# Altium PCB S6_Relay_block.PcbDoc
Units mm, origin at the board's own origin, x right, y up, seen from the top; angles counter-clockwise.
Board outline 61 x 55.6 mm, 2 copper layers (Top Layer, Bottom Layer); 95 components, 58 nets, 276 pads, 122 vias.
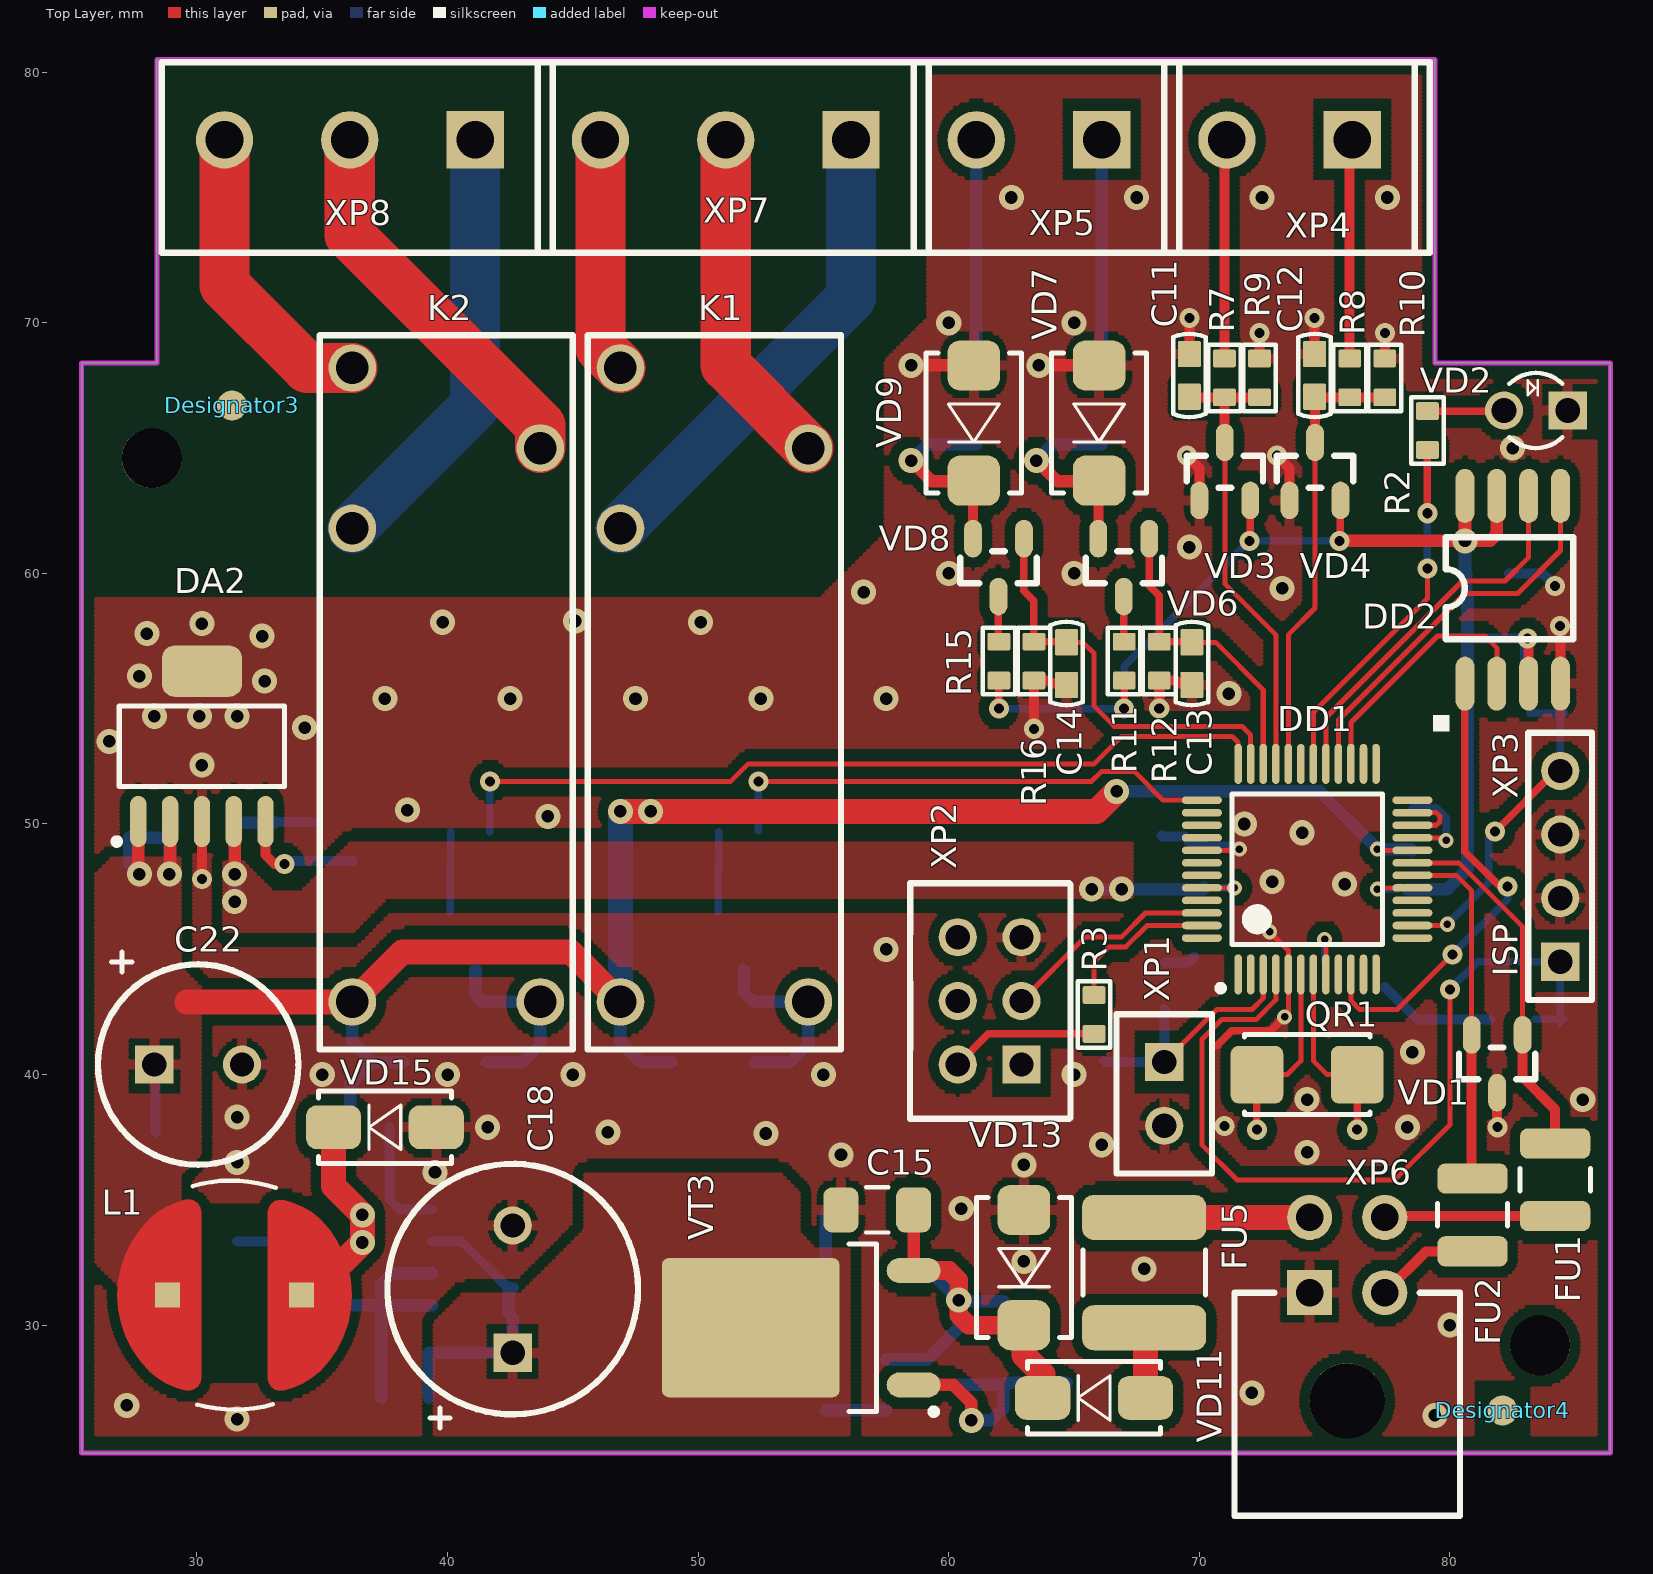
[diagram p0: Top Layer view]
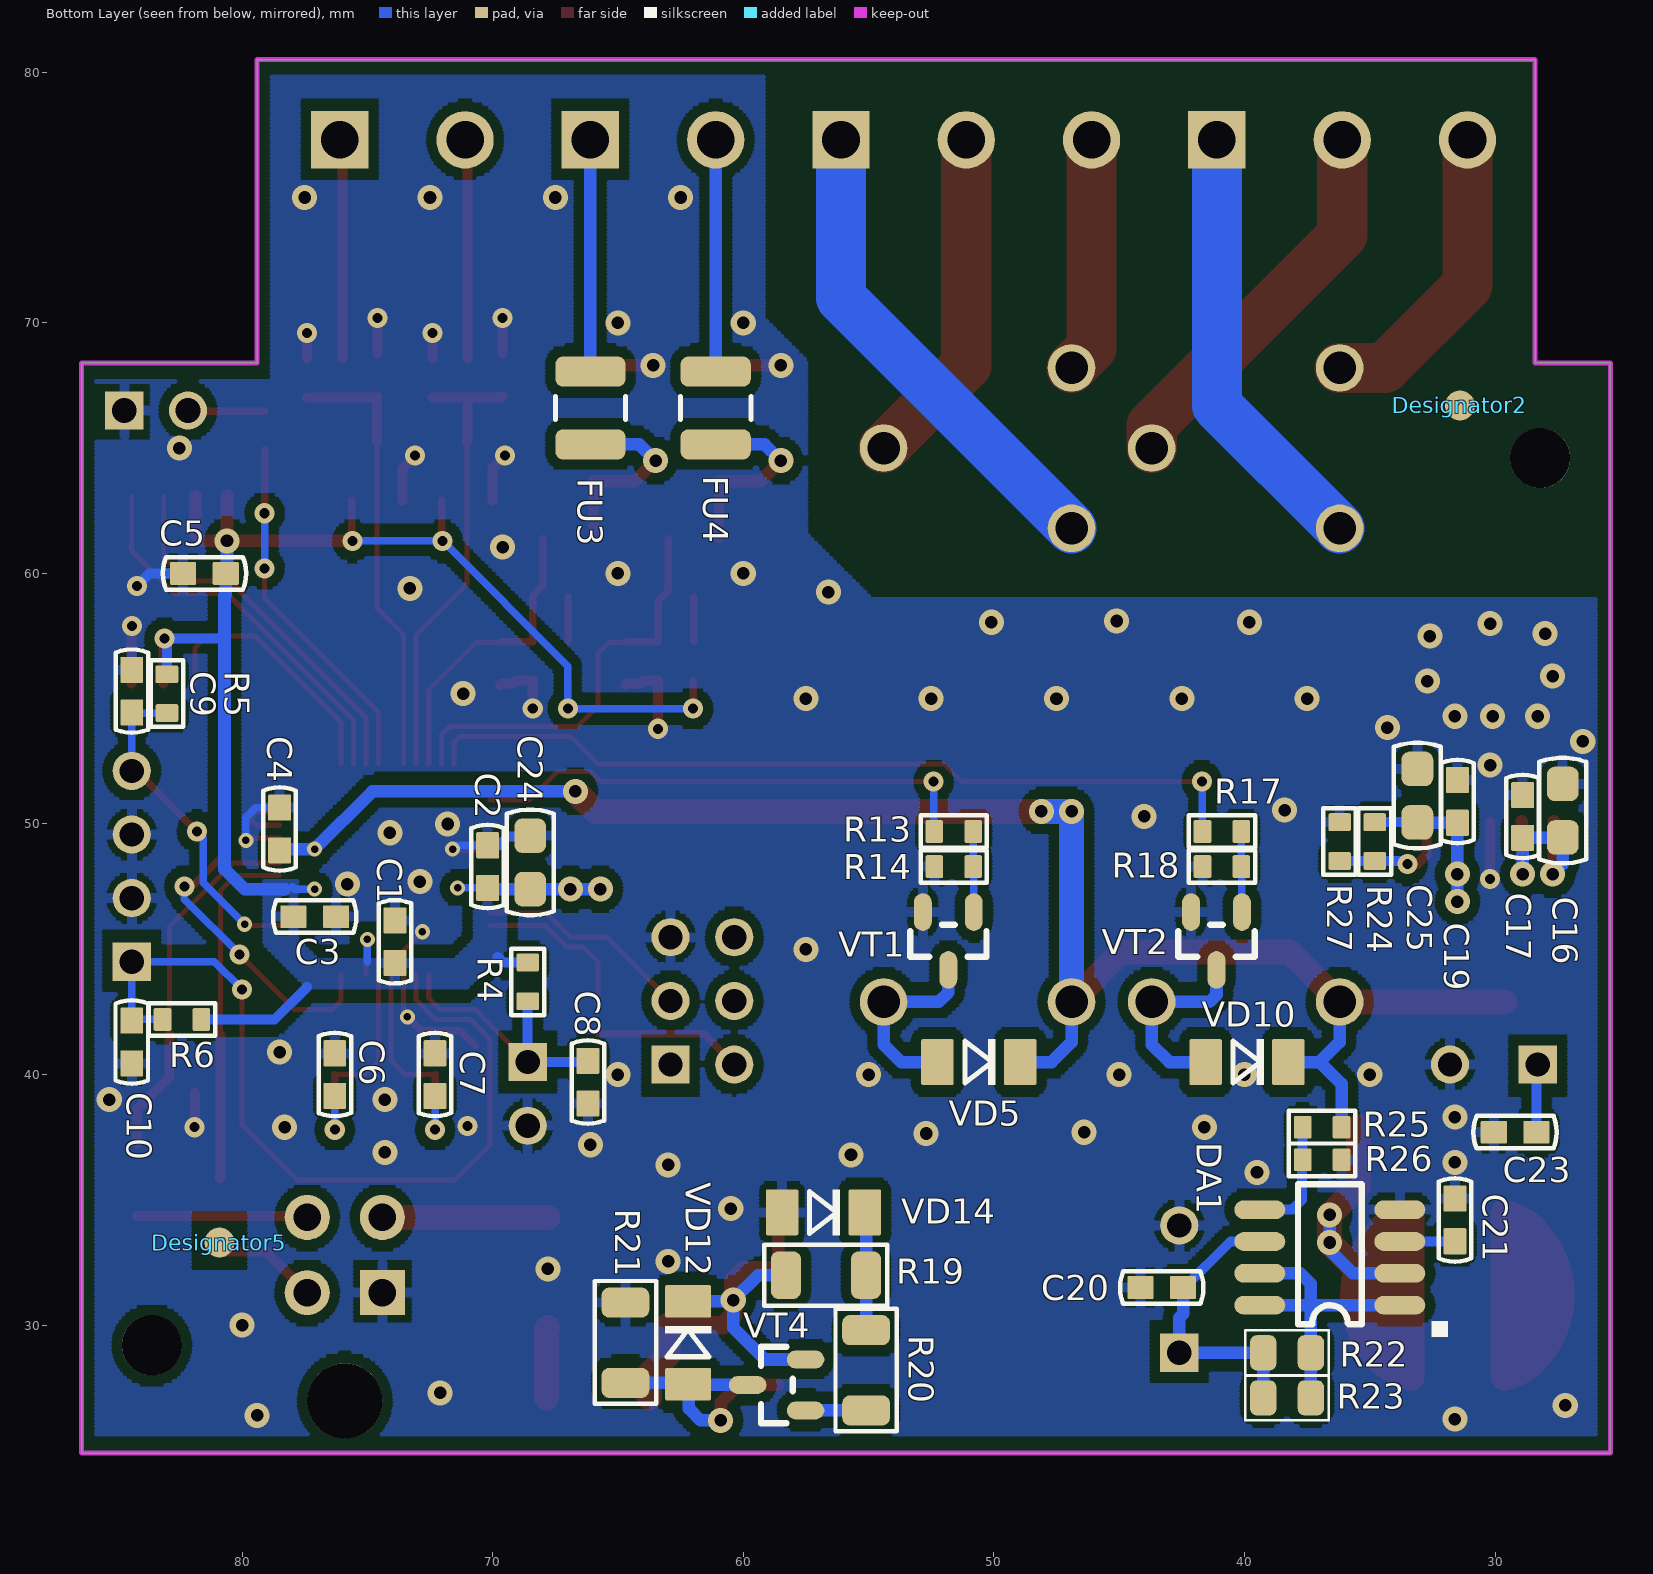
[diagram p1: Bottom Layer view, seen from below]

## Layer stack, top to bottom
Top Solder: solder mask 0.0102, Solder Resist, Dk 3.5
Top Layer: signal copper 0.0356
Dielectric 1: dielectric 0.32, FR-4, Dk 4.8
Bottom Layer: signal copper 0.0356
Bottom Solder: solder mask 0.0102, Solder Resist, Dk 3.5

## Board outline
25.4,24.9 25.4,68.4 28.4,68.4 28.4,80.5 79.4,80.5 79.4,68.4 86.4,68.4 86.4,24.9

## Design rules (kind name [scope] priority, off if disabled: settings)
Clearance Clearance_keepout [IsKeepOut] p1: gap=0.4
Clearance Clearance_Poly [All vs InPoly] p2: gap=0.4
Clearance [All] p3: gap=0.2
ComponentClearance [All] p1: gap=0 collisioncheckmode=3 verticalgap=0 showdistances=FALSE
HoleSize [All] p1: absolutevalues=TRUE maxlimit=8 minlimit=0.025 maxpercent=80.000 minpercent=20.000
MinimumSolderMaskSliver [All] p1: minsoldermaskwidth=0.076
MinimumSolderMaskSliver SilkscreenOverComponentPads [All] p2: minsoldermaskwidth=0.254
PlaneConnect [All] p1: planeconnectstyle=Relief reliefexpansion=0.2 reliefentries=4 reliefconductorwidth=0.254 reliefairgap=0.2
PolygonConnect PolygonConnect_Thermal [IsPad And (PadXSize_TopLayer > 3)] p1: connectstyle=Direct reliefconductorwidth=0.254 reliefentries=4 polygonreliefangle="90 Angle" airgapwidth=0.254
PolygonConnect PolygonConnect_VIA [IsVia] p2: connectstyle=Direct reliefconductorwidth=0.254 reliefentries=4 polygonreliefangle="90 Angle" airgapwidth=0.254
PolygonConnect [All] p3: connectstyle=Relief reliefconductorwidth=0.4 reliefentries=4 polygonreliefangle="90 Angle" airgapwidth=0.254
RoutingVias [All] p1: holewidth=0.3 width=0.6 viastyle="Through Hole" minholewidth=0.3 minwidth=0.6 maxholewidth=0.5 maxwidth=1
SilkToSilkClearance [All] p1: silktosilkclearance=0
SilkToSolderMaskClearance [IsPad] p1: minsilkscreentomaskgap=0.1 clearancetoexposedcopper=TRUE
SolderMaskExpansion SolderMaskExpansion_DD2 [IsPad And InComponent(DD2)] p1: expansion=0.05
SolderMaskExpansion SolderMaskExpansion_VIA [IsVia] p2: expansion=-25.4
SolderMaskExpansion SolderMaskExpansion_1 [IsPad And PadYSize_TopLayer < 0.4] p3: expansion=0.05
SolderMaskExpansion [All] p4: expansion=0.076
Width [All] p1: maxlimit=2 minlimit=0.2 preferedwidth=0.3
24 further rules are at their usual default settings.

## Classes and differential pairs
component class Power: C15 C16 C17 C18 C19 C20 C21 C22 C23 C25 DA1 DA2 FU5 L1 R19 R20 R21 R22 R23 R24 R25 R26 R27 VD11 VD12 VD13 VD14 VD15 VT3 VT4 XP6
component class Output: C13 C14 FU3 FU4 K1 K2 R11 R12 R13 R14 R15 R16 R17 R18 VD5 VD6 VD7 VD8 VD9 VD10 VT1 VT2 XP4 XP5 XP7 XP8
component class Main: C1 C2 C3 C4 C5 C6 C7 C8 C9 C10 C11 C12 C24 DD1 DD2 FU1 FU2 QR1 R2 R3 R4 R5 R6 R7 R8 R9 R10 VD1 VD2 VD3 VD4 XP1 XP2 XP3

## Components (designator, comment, footprint, x,y, rotation, side; value= is the part's Value field where it differs from the comment)
C1 "0.1uF" CC0603-3M 73.9,45.3 r90 bottom
C2 "0.1uF" CC0603-3M 70.2,48.3 r90 bottom
C3 "0.1uF" CC0603-3M 77.1,46.3 r180 bottom
C4 "0.1uF" CC0603-3M 78.5,49.8 r90 bottom
C5 "0.1uF" CC0603-3M 81.5,60 r180 bottom
C6 "22pF" CC0603-3M 76.3,40 r270 bottom
C7 "22pF" CC0603-3M 72.3,40 r270 bottom
C8 "220pF" CC0603-3M 66.2,39.7 r90 bottom
C9 "220pF" CC0603-3M 84.4,55.3 r270 bottom
C10 "220pF" CC0603-3M 84.4,41.3 r90 bottom
C11 "0.1uF" CC0603-3M 69.6,67.9 r270 top
C12 "0.1uF" CC0603-3M 74.6,67.9 r270 top
C13 "0.1uF" CC0603-3M 69.7,56.4 r90 top
C14 "0.1uF" CC0603-3M 64.7,56.4 r90 top
C15 "0.1uFx250V" CC1206-MIDI 55.7,34.6 r0 top
C16 "4.7uFx10V" CC0805-MIDI-2M1 27.3,51.6 r270 bottom
C17 "0.1uF" CC0603-3M 28.9,50.3 r90 bottom
C18 "470uF x 35V" CC16X10_CAP0.5(1)(Primary) 42.6,28.9 r90 top
C19 "0.1uF" CC0603-3M 31.5,50.9 r270 bottom
C20 "0.1uF" CC0603-3M 43.3,31.5 r0 bottom
C21 "330pFx50V" CC0603-3M 31.6,34.2 r270 bottom
C22 "1000uF x 6.3V" CC8X3.5 28.3,40.4 r0 top
C23 "1uFx10V" CC0603-3M 29.2,37.7 r180 bottom
C24 "4.7uFx10V" CC0805-MIDI-2M1 68.5,47.4 r90 bottom
C25 "4.7uFx10V" CC0805-MIDI-2M1 33.1,52.2 r270 bottom
DA1 "MC34063" SO-8 33.8,30.8 r90 bottom
DA2 "MCP1824T-ADJE/DC" SOT223-6 30.2,53.1 r90 top
DD1 "LPC11C24FBD48" LQFP-48 74.3,48.2 r90 top
DD2 "M25P40" EIAJ_SO8 80.6,55.6 r90 top
Designator2 "Comment" REPER1.2 31.4,66.7 r90 bottom
Designator3 "Comment" REPER1.2 31.4,66.7 r90 top
Designator4 "Comment" REPER1.2 82.1,26.6 r90 top
Designator5 "Comment" REPER1.2 80.9,33.3 r90 bottom
FU1 "MICROSMD010F" RC1210 84.2,35.8 r270 top
FU2 "MICROSMD010F" RC1210 80.9,34.4 r270 top
FU3 "MICROSMD010F" RC1210 66.1,66.6 r270 bottom
FU4 "MICROSMD010F" RC1210 61.1,66.6 r270 bottom
FU5 "MF-SMDF050" MF-SMDF 67.8,32.1 r270 top
K1 "RY21" RY21_RY21(Primary) 46.9,42.9 r90 top
K2 "RY21" RY21_RY21(Primary) 36.2,42.9 r90 top
L1 "220uH" SDR0805 31.5,31.2 r0 top
QR1 "NX5032GA-12.000MHz LN-CD-1" AC5032_2 74.3,40 r0 top
R2 "330" RC0603-3M 79.1,65.7 r90 top
R3 "100E" RC0603-3M 65.8,42.4 r270 top
R4 "10k" RC0603-3M 68.6,43.7 r270 bottom
R5 "10k" RC0603-3M 83,55.2 r90 bottom
R6 "10k" RC0603-3M 82.4,42.2 r180 bottom
R7 "75k" RC0603-3M 71,67.8 r270 top
R8 "75k" RC0603-3M 76,67.8 r270 top
R9 "10k" RC0603-3M 72.4,67.8 r270 top
R10 "10k" RC0603-3M 77.4,67.8 r270 top
R11 "4k7" RC0603-3M 67,56.5 r270 top
R12 "100k" RC0603-3M 68.4,56.5 r90 top
R13 "4k7" RC0603-3M 51.6,49.7 r180 bottom
R14 "47k" RC0603-3M 51.6,48.3 r180 bottom
R15 "4k7" RC0603-3M 62,56.5 r270 top
R16 "100k" RC0603-3M 63.4,56.5 r90 top
R17 "4k7" RC0603-3M 40.9,49.7 r180 bottom
R18 "47k" RC0603-3M 40.9,48.3 r180 bottom
R19 "220k" RC1206-2M 55.1,32 r0 bottom
R20 "220k" RC1206-2M 55.1,26.6 r90 bottom
R21 "220k" RC1206-2M 64.7,27.7 r90 bottom
R22 "1E" RC0805_IPC_NOM 38.3,28.9 r180 bottom
R23 "1E" RC0805_IPC_NOM 38.3,27.1 r180 bottom
R24 "105k 1%" RC0603-3M 34.8,49.3 r90 bottom
R25 "3k 1%" RC0603-3M 36.9,37.9 r180 bottom
R26 "1k 1%" RC0603-3M 36.9,36.6 r0 bottom
R27 "15k 1%" RC0603-3M 36.2,49.3 r270 bottom
VD1 "PESD2CAN" SOT-23(123) 82.9,41.6 r90 top
VD2 "BL-B45V1F" LED3 84.7,66.5 r180 top
VD3 "BAT54S" SOT-23(GSD) 70,62.9 r0 top
VD4 "BAT54S" SOT-23(GSD) 73.6,62.9 r0 top
VD5 "LL4148" SOD-80 50.6,40.5 r0 bottom
VD6 "BAT54A" SOT-23(123) 68,61.4 r90 top
VD7 "P6SMBJ28A" SMB 66,66 r90 top
VD8 "BAT54A" SOT-23(123) 63,61.4 r90 top
VD9 "P6SMBJ28A" SMB 61,66 r90 top
VD10 "LL4148" SOD-80 39.9,40.5 r0 bottom
VD11 "GS1M" SMA 65.8,27.1 r180 top
VD12 "BZV55C15" SOD-80 62.2,29.3 r270 bottom
VD13 "SMBJ150A" SMB 63,32.3 r90 top
VD14 "BZV55C36" SOD-80 56.8,34.5 r0 bottom
VD15 "SS14" SMA 37.5,37.9 r180 top
VT1 "BC817-40" SOT-23(123) 50.8,46.5 r90 bottom
VT2 "BC817-40" SOT-23(123) 40.1,46.5 r90 bottom
VT3 "IRFR9220" D-PAK(TO-252AA) 54.1,29.9 r180 top
VT4 "BC856B" SOT-23(123) 57.5,26.6 r180 bottom
XP1 "PLS-02" PIN2W 68.6,40.5 r270 top
XP2 "PLD-06" PIN6 62.9,40.4 r90 top
XP3 "PLS04" PIN04S 84.4,44.5 r90 top
XP4 "TC020060" TC020060 76.1,77.3 r180 top
XP5 "TC020060" TC020060 66.1,77.3 r180 top
XP6 "MIF2X02PRP" MIF2X02PRP 74.4,31.3 r270 top (schematic designator XP5)
XP7 "TC030060" TC030060 56.1,77.3 r180 top
XP8 "TC030060" TC030060 41.1,77.3 r180 top

## Footprints (in the part's own frame and the unit in brackets; to place one, negate y for a bottom-side part, rotate by r counter-clockwise, add the part's x,y. Pads: shape width x height; smd on the part's side, far side on the other; paste and mask are expansions set on the pad)
AC5032_2 [mm]
  rrect30% 2.1x2.3 smd: 1(-2,0) 2(2,0)
  silkscreen extent -2.5,-1.6 2.5,1.6
CC8X3.5 [mil]
  rect 60x60 hole 38: 1(0,0)
  round 60 hole 38: 2(137.8,0)
  silkscreen extent -89,-157 226,157
CC16X10_CAP0.5(1)(Primary) [mil]
  round 60 hole 38: 1(200,0)
  rect 60x60 hole 38: 2(0,0)
  silkscreen extent -97,-197 297,197
CC0603-3M [mil]
  rrect10% 40.98x35.98 smd paste-1000: 1(-33.5,0) 2(33.5,0)
  silkscreen extent -65,-26 65,26
CC0805-MIDI-2M1 [mil]
  rrect50% 54x50 smd: 1(0,0) 2(84,0)
  silkscreen extent -41,-37 125,37
CC1206-MIDI [mm]
  rrect50% 1.4x1.8 smd: 1(0,0) 2(2.9,0)
  silkscreen extent 1,-0.9 1.9,0.9
D-PAK(TO-252AA) [mm]
  oval 2.15x1 smd: 1(-4.5,2.28) 2(-4.5,-2.28)
  rrect10% 7.1x5.55 smd: 3(2,0)
  silkscreen extent -5.42,-3.35 -1.92,3.47
EIAJ_SO8 [mil]
  oval 85x29.53 smd: 1(0,0) 2(0,-50) 3(0,-100) 4(0,-150) 5(295,-150) 6(295,-100) 7(295,-50) 8(295,0)
  silkscreen extent -75,-170 230,50
LED3 [mil]
  rect 60x60 hole 39: 1(0,0)
  round 60 hole 39: 2(100,0)
  silkscreen extent 8,-59 92,59
LQFP-48 [mm]
  oval 1.6x0.3 smd: 1(-4.2,2.75) 2(-4.2,2.25) 3(-4.2,1.75) 4(-4.2,1.25) 5(-4.2,0.75) 6(-4.2,0.25) 7(-4.2,-0.25) 8(-4.2,-0.75) 9(-4.2,-1.25) 10(-4.2,-1.75) 11(-4.2,-2.25) 12(-4.2,-2.75) 25(4.2,-2.75) 26(4.2,-2.25) 27(4.2,-1.75) 28(4.2,-1.25) 29(4.2,-0.75) 30(4.2,-0.25) 31(4.2,0.25) 32(4.2,0.75) 33(4.2,1.25) 34(4.2,1.75) 35(4.2,2.25) 36(4.2,2.75)
  oval 0.3x1.6 smd: 13(-2.75,-4.2) 14(-2.25,-4.2) 15(-1.75,-4.2) 16(-1.25,-4.2) 17(-0.75,-4.2) 18(-0.25,-4.2) 19(0.25,-4.2) 20(0.75,-4.2) 21(1.25,-4.2) 22(1.75,-4.2) 23(2.25,-4.2) 24(2.75,-4.2) 37(2.75,4.2) 38(2.25,4.2) 39(1.75,4.2) 40(1.25,4.2) 41(0.75,4.2) 42(0.25,4.2) 43(-0.25,4.2) 44(-0.75,4.2) 45(-1.25,4.2) 46(-1.75,4.2) 47(-2.25,4.2) 48(-2.75,4.2)
  silkscreen extent -4.87,-3 3,3.57
MF-SMDF [mm]
  rrect50% 1.8x4.95 smd: 1(-2.2,0) 2(2.2,0)
  silkscreen extent -0.9,-2.45 0.9,2.45
MIF2X02PRP [mm]
  rect 1.8x1.8 hole 1.1: 1(0,0)
  round 1.8 hole 1.1: 2(0,3) 3(-3,0) 4(-3,3)
  round 3 hole 3 unplated: 5(4.32,1.5)
  silkscreen extent 0,-3 8.9,6
PIN2W [mil]
  rect 60x60 hole 38: 1(0,0)
  round 60 hole 38: 2(100,0)
  silkscreen extent -75,-75 175,75
PIN04S [mil]
  rect 60x60 hole 38: 1(0,0)
  round 60 hole 38: 2(100,0) 3(200,0) 4(300,0)
  silkscreen extent -60,-50 360,50
PIN6 [mil]
  rect 60x60 hole 38: 1(0,0)
  round 60 hole 38: 2(0,100) 3(100,0) 4(100,100) 5(200,0) 6(200,100)
  silkscreen extent -85,-77 285,175
RC0603-3M [mm]
  rrect20% 0.71x0.91 smd paste-25.4: 1(-0.775,0) 2(0.775,0)
  silkscreen extent -1.32,-0.65 1.33,0.65
RC0805_IPC_NOM [mm]
  rrect50% 1.05x1.4 smd: 1(-0.95,0) 2(0.95,0)
  silkscreen extent -1.67,-0.89 1.67,0.89
RC1206-2M [mm]
  rrect50% 1.2x1.9 smd: 1(0,0) 2(3.2,0)
  silkscreen extent -0.84,-1.22 4.06,1.22
RC1210 [mm]
  rrect50% 1.2x2.8 smd: 1(-1.45,0) 2(1.45,0)
  silkscreen extent -0.45,-1.4 0.45,1.4
REPER1.2 [mm]
  round 1.2 smd paste-25.4 mask-25.4: 1(0,0)
  Top Layer pour cut-out: -1.2,-1.2 1.2,-1.2 1.2,1.2 -1.2,1.2
RY21_RY21(Primary) [mm]
  round 1.9 hole 1.3: 1(0,-7.5) 2(0,0) 11(22.1,-7.5) 12(18.9,0) 14(25.3,0)
  silkscreen extent -1.9,-8.8 26.6,1.3
SDR0805 [mm]
  rect 1x1 smd paste-25.4 mask-25.4: 1(-2.667,0) 2(2.667,0)
  Top Layer region: -1.327,3.319 -1.362,3.503 -1.461,3.66 -1.612,3.771 -1.792,3.818 -1.977,3.797 -2.318,3.69 -2.706,3.535 -3.065,3.321 -3.387,3.053 -3.392,3.047 -3.771,2.627 -4.09,2.16 -4.345,1.654 -4.53,1.119 -4.642,0.565 -4.68,0 -4.642,-0.565 -4.53,-1.119 -4.345,-1.654 -4.09,-2.16 -3.771,-2.627 -3.392,-3.047 -3.381,-3.059 -3.063,-3.323 -2.709,-3.534 -2.325,-3.688 -1.996,-3.791 -1.806,-3.813 -1.62,-3.764 -1.465,-3.65 -1.363,-3.488 -1.327,-3.299
  Top Layer region: 1.327,-3.319 1.362,-3.503 1.461,-3.66 1.612,-3.771 1.792,-3.818 1.977,-3.797 2.318,-3.69 2.706,-3.535 3.065,-3.321 3.387,-3.053 3.392,-3.047 3.771,-2.627 4.09,-2.16 4.345,-1.654 4.53,-1.119 4.642,-0.565 4.68,0 4.642,0.565 4.53,1.119 4.345,1.654 4.09,2.16 3.771,2.627 3.392,3.047 3.381,3.059 3.063,3.323 2.709,3.534 2.325,3.688 1.996,3.791 1.806,3.813 1.62,3.764 1.465,3.65 1.363,3.488 1.327,3.299
  silkscreen extent -1.66,-4.57 1.64,4.57
SMA [mm]
  rrect50% 2.2x1.75 smd: 1(-2.05,0) 2(2.05,0)
  silkscreen extent -2.65,-1.45 2.65,1.45
SMB [mm]
  rrect50% 2x2.1 smd: 1(2.3,0) 2(-2.3,0)
  silkscreen extent -2.8,-1.9 2.8,1.9
SO-8 [mil]
  oval 29.53x80 smd: 1(0,0) 2(50,0) 3(100,0) 4(150,0) 5(150,220) 6(100,220) 7(50,220) 8(0,220)
  silkscreen extent -50,-75 190,160
SOD-80 [mm]
  rrect10% 1.3x1.83 smd paste-25.4: 1(1.651,0) 2(-1.651,0)
  silkscreen extent -0.66,-0.91 0.56,0.91
SOT223-6 [mm]
  oval 2.05x0.65 smd: 1(-3,2.54) 2(-3,1.27) 3(-3,0) 4(-3,-1.27) 5(-3,-2.54)
  rrect50% 2.05x3.2 smd: 6(3,0)
  silkscreen extent -3.92,-3.3 1.6,3.52
SOT-23(123) [mil]
  oval 59.06x28.07 smd: 1(-0.5,0) 2(-0.5,80) 3(-91.5,40)
  silkscreen extent -70,-20 -21,100
SOT-23(GSD) [mil]
  oval 28.07x59.06 smd: 1(0,0.5) 2(80,0.5) 3(40,91.5)
  silkscreen extent -20,20 100,70
TC020060 [mil]
  rect 90x90 hole 59: 1(0,0)
  round 90 hole 59: 2(196.85,0)
  silkscreen extent -122,-122 295,177
TC030060 [mil]
  rect 90x90 hole 59: 1(0,0)
  round 90 hole 59: 2(196.85,0) 3(393.7,0)
  silkscreen extent -122,-122 492,177

## Part data
C1 C2 C3 C4 C5 C6 C7 C8 C9 C10 C11 C12 C13 C14 C17 C19 C20 C21 C23: library part CC0603, "CC0603"
C15: library part CC1206, "CC1206"
C16 C24 C25: library part CC0805, "CC0805"
C18: library part CAP0.5(1), "CAP0.5(1)"
C22: library part CAP0.35, "CAP0.35"
DA2: "300 mA, Low Voltage, Low Quiescent Current LDO Regulator, 5-Pin SOT-223, Extended Temperature, Tape and Reel"
DD2: library part S25FL016A0LMFI01, "S25FL016A0LMFI01"
FU1 FU2 FU3 FU4: library part MICROSMD, "MICROSMD"
FU5: library part MF-SMDF, "MF-SMDF"
L1: library part SDR0805, "SDR0805"
QR1: library part AC5032_2, "AC5032/2"
R2 R3 R4 R5 R6 R7 R8 R9 R10 R11 R12 R13 R14 R15 R16 R17 R18 R24 R25 R26 R27: library part RC0603, "RC0603"
R19 R20 R21: library part RC1206, "RC1206"
R22 R23: library part RC0805, "RC0805"
VD1: "TVS for CAN"
VD2: library part LED_3, "LED_3"
VD3 VD4 VD6 VD8: "1.0 Ampere General Purpose Rectifier"
VD7 VD9 VD13: library part SMBJ, "SMBJ"
VD12 VD14: library part BZV55C12, "Zener Voltage Regulator Diode"
VD15: "Schottky Rectifier"
VT1 VT2: library part BC846BLT1, "BC846BLT1"
VT3: "HEXFET Power MOSFET"
XP2: "PLD06"

## Free pads (board coordinates)
  round 2.4 hole 2.4 unplated paste+0 mask+0.102: 0(28.2,64.6)
  round 2.4 hole 2.4 unplated: 0(83.6,29.2)

## Via types
v1: diameter 1, hole 0.5, Top Layer to Bottom Layer, 84 vias
v2: diameter 0.8, hole 0.4, Top Layer to Bottom Layer, 29 vias
v3: diameter 0.6, hole 0.3, Top Layer to Bottom Layer, 9 vias

## Nets (pads, with @x,y where several pads share a name; then routed paths per layer and width w, separated by ;. In a path a pad name is that pad's centre, name@x,y a point inside that pad or via, vN(x,y) a via of type N, cw(c..) or ccw(c..) an arc to the next point about the centre after c; other vN are vias at no path point)
+5V: C4.1 C16.2 C17.1 C22.1 C23.2 DA2.1 DA2.2 DD1.20 K1.2 K2.2 L1.1 R25.2 VD5.2 VD10.2 | length 84.3
  Top Layer w0.2: v3(77.1,49) 77.15,48.95 DD1.20
  Top Layer w0.5: v1@27.6,48.2 27.66,48.26 DA2.1 ; v1@28.9,48.2 28.93,48.23 DA2.2
  Top Layer w1: 29.6,42.9 K2.2 38.2,44.9 44.9,44.9 K1.2 ; v1(46.9,50.5) v1(48.1,50.5) 65.9,50.5 v1(66.7,51.3)
  Bottom Layer w0.4: C22.1 28.349,40.351 C23.2
  Bottom Layer w0.5: v1(27.7,48) 27.3,48.4 C16.2 27.317,49.449 C17.1 v1(28.9,48) ; R25.2 36.125,39.625 37,40.5 ; K2.2 36.2,41.3 37,40.5 ; VD10.2 37,40.5 ; K1.2 46.9,41.3 47.7,40.5 VD5.2 ; v1(66.7,51.3) 74.8,51.3 v3(77.1,49) 78.449,49 C4.1
  Bottom Layer w1: K1.2 v1(46.9,50.5) v1(48.1,50.5)
ANALOG1: R8.1 XP4.1 | length 8.8
  Top Layer w0.4: R8.1 76,77.2 XP4.1
ANALOG1_F: C12.2 DD1.32 R8.2 R10.2 VD4.3 | length 17.9
  Top Layer w0.2: DD1.32 73.55,57.55 74.616,58.616 VD4.3
  Top Layer w0.4: C12.2 C12.2@74.616,67.033 ; VD4.3 C12.2@74.616,67.033 ; R10.2 R8.2 74.624,67.025 C12.2@74.616,67.033
ANALOG2: R7.1 XP4.2 | length 8.8
  Top Layer w0.4: R7.1 71,77.2 XP4.2
ANALOG2_F: C11.2 DD1.33 R7.2 R9.2 VD3.3 | length 18.3
  Top Layer w0.2: VD3.3 71.016,59.584 73.05,57.55 DD1.33
  Top Layer w0.4: C11.2 69.624,67.025 R7.2 ; VD3.3 71,65.24 R7.2 ; R9.2 R7.2
CANH: DD1.19 FU1.1 VD1.1 | length 14.6
  Top Layer w0.2: DD1.19 80.35,48.45 82.9,45.9 VD1.1
  Top Layer w0.4: VD1.1 82.9,39.9 84.2,38.6 FU1.1
CANH_F: FU1.2 XP6.4 | length 6.8
  Top Layer w0.4: XP6.4 77.45,34.35 FU1.2
CANL: DD1.18 FU2.1 VD1.2 | length 14.1
  Top Layer w0.2: DD1.18 80.25,47.95 80.868,47.332 VD1.2
  Top Layer w0.4: VD1.2 80.868,35.882 FU2.1
CANL_F: FU2.2 XP6.2 | length 4.2
  Top Layer w0.4: XP6.2 79.05,32.95 FU2.2
GND: C1.2 C2.2 C3.2 C4.2 C5.1 C6.1 C7.1 C8.1 C9.1 C10.1 C11.1 C12.1 C13.1 C14.1 C15.1 C16.1 C17.2 C18.1 C19.1 C20.2 C21.1 C22.2 C23.1 C24.2 C25.1 DA1.4 DA2.3 DA2.6 DD1.5 DD1.21 DD1.41 DD2.4 R9.1 R10.1 R12.1 R14.1 R16.1 R18.1 R21.2 R26.1 R27.1 VD1.3 VD2.1 VD3.1 VD4.1 VD7.1 VD9.1 VD13.1 VD14.1 VD15.1 VT1.2 VT2.2 XP1.2 XP2.5 XP3.2 XP3.3 XP6.1 | length 43.3
  Top Layer w0.2: DD1.41 71.55,48.95 v3(71.6,49) ; v3(72.8,45.7) 73.55,44.95 DD1.5 73.55,42.45 v3(73.4,42.3) ; DD1.21 79.85,49.45 v3(79.85,49.35)
  Top Layer w0.3: 70.7,41.151 71.299,41.75 72.85,41.75 v3(73.4,42.3)
  Top Layer w0.4: v2(30.2,47.8) DA2.3 ; v2(63.4,53.8) R16.1 63.975,55.725 64.1,55.6 64.649,55.6 C14.1 ; v2(68.4,54.6) R12.1 69.075,55.725 69.2,55.6 69.649,55.6 C13.1 ; v2(69.5,64.7) 70,64.2 VD3.1 ; C11.1 v2(69.6,70.2) ; R9.1 v2(72.4,69.6) ; v2(73.1,64.7) 73.6,64.2 VD4.1 ; C12.1 v2(74.6,70.2) ; R10.1 v2(77.4,69.6) ; VD1.3 81.884,37.916 v2(81.9,37.9) ; v2(84.4,57.9) 84.41,57.89 DD2.4
  Top Layer w0.5: v1(58.5,68.3) VD9.1 ; v1(63.6,68.3) VD7.1
  Bottom Layer w0.3: C2.2 71.449,49.151 v3(71.6,49) ; C4.2 79.449,50.651 79.85,50.25 v3(79.85,49.35)
  Bottom Layer w0.4: C24.2 68.534,49.5 69.4,49.5 69.749,49.151 C2.2 ; C5.1 83.7,60 v2(84.2,59.5)
  other v1: 31.6,26.25 79.4,26.4 27.2,26.8 72.1,27.3 80,30 67.8,32.25 63,32.55 60.5,34.65 39.5,36.1 63,36.4 31.6,36.5 55.7,36.8 74.3,36.9 66.1,37.2 52.7,37.65 46.4,37.7 41.6,37.9 78.3,37.9 31.6,38.3 74.3,39 85.3,39 35,40 40,40 45,40 55,40 65,40 78.5,40.9 57.5,45 75.8,47.6 72.9,47.7 74.1,49.65 71.8,50 44,50.3 38.4,50.55 30.2,52.35 26.5,53.3 34.3,53.85 28.3,54.3 30.1,54.3 31.6,54.3 37.5,55 42.5,55 47.5,55 52.5,55 57.5,55 71.181,55.2 32.7,55.7 27.7,55.9 32.6,57.5 28,57.6 30.2,58 39.8,58.05 50.1,58.05 45.1,58.1 56.6,59.25 73.3,59.4 60,60 65,60 69.6,61.05 82.5,65 60,70 65,70 62.5,75 67.5,75 72.5,75 77.5,75
  other v2: 71,37.95
ISP_START: C10.2 DD1.4 R6.1 XP3.1 | length 34.3
  Top Layer w0.2: DD1.4 73.05,42.984 72.266,42.2 70.9,42.2 70.1,41.4 70.1,37.2 71.5,35.8 77.8,35.8 80,38 v2(80,43.4)
  Bottom Layer w0.3: v2(80,43.4) 81.1,44.5 XP3.1 84.4,42.049 84.551,42.2 R6.1@83.375,42.2
ISP_VAR: C9.2 DD1.14 R5.1 XP3.4 | length 13.9
  Top Layer w0.2: DD1.14 79.85,45.95 v3(79.9,46)
  Top Layer w0.3: v2(81.8,49.7) 84.22,52.12 XP3.4@84.6,52.12
  Bottom Layer w0.3: v3(79.9,46) 81.55,47.65 81.55,49.45 v2(81.8,49.7) ; R5.1@83.2,54.425 84.576,54.425 84.4,54.601 84.4,52.32 XP3.4@84.6,52.12
MISO: DD1.27 DD2.2 | length 10.5
  Top Layer w0.2: DD1.27 76.05,54.05 79.5,57.5 81.4,57.5 81.87,57.03 DD2.2
MOSI: DD1.28 DD2.5 | length 15.6
  Top Layer w0.2: DD1.28 75.55,54.15 80.6,59.2 82.7,59.2 84.41,60.91 DD2.5
NetC15_2: C15.2 R19.2 VD11.2 VD12.2 VD13.2 VT3.2 VT4.2 | length 20.6
  Top Layer w0.5: VT3.2 C15.2
  Top Layer w0.75: VT3.2 60.02,32.18 60.4,31.8 v1(60.4,31) 60.4,30.4 60.8,30 VD13.2
  Top Layer w1: VD13.2 63,28.8 63.75,28.05 VD11.2
  Bottom Layer w0.5: VT4.2 59.132,28.632 60.4,29.9 v1(60.4,31) ; R19.2 59.4,32 v1(60.4,31) ; VD12.2 60.449,30.951 v1(60.4,31)
NetC21_2: C21.2 DA1.3 | length 2.2
  Bottom Layer w0.4: C21.2 33.791,33.349 DA1.3
NetDA1_1: DA1.1 DA1.7 DA1.8 R22.2 R23.2 | length 12.3
  Bottom Layer w0.5: DA1.1 37.35,30.8 ; R23.2 R22.2 37.35,30.8 ; DA1.8 37.35,30.8 ; DA1.7 37.77,32.07 37.55,31.85 37.35,31.65 37.35,30.8
NetDA1_2: DA1.2 L1.2 VD15.2 | length 13
  Top Layer w1: L1.2 34.5,31.2 v1(36.6,33.3) v1(36.6,34.4) 35.45,35.55 VD15.2
  Bottom Layer w0.5: DA1.2 35.67,32.07 36.6,33 v1(36.6,33.3) v1(36.6,34.4)
NetDA1_5: DA1.5 R25.1 R26.2 | length 4.8
  Bottom Layer w0.4: R25.1 R26.2 37.7,36.575 37.7,35 38.09,34.61 DA1.5
NetDA2_5: DA2.5 R24.1 R27.2 | length 5
  Top Layer w0.4: DA2.5 32.74,48.76 33.1,48.4 v2(33.5,48.4)
  Bottom Layer w0.4: v2(33.5,48.4) 33.625,48.525 R24.1 R27.2
NetDD1_30: DD1.30 R2.1 | length 14.4
  Top Layer w0.2: DD1.30 74.55,54.45 79.1,59 v2(79.1,60.2)
  Top Layer w0.3: v2(79.1,62.4) R2.1
  Bottom Layer w0.3: v2(79.1,60.2) v2(79.1,62.4)
NetFU3_2: FU3.2 VD6.2 VD7.2 | length 8
  Top Layer w0.4: VD6.2 65.968,63.668 VD7.2
  Top Layer w0.5: v1(63.5,64.5) 64.332,63.668 VD7.2@65.968,63.668
  Bottom Layer w0.5: v1(63.5,64.5) 64.15,65.15 FU3.2
NetFU4_2: FU4.2 VD8.2 VD9.2 | length 8
  Top Layer w0.4: VD8.2 60.968,63.668 VD9.2
  Top Layer w0.5: v1(58.5,64.5) 59.332,63.668 VD9.2@60.968,63.668
  Bottom Layer w0.5: v1(58.5,64.5) 59.15,65.15 FU4.2
NetFU5_2: FU5.2 VD11.1 | length 2.8
  Top Layer w1: FU5.2 67.85,29.85 VD11.1
NetK1_1: K1.1 VD5.1 VT1.3 | length 7.8
  Bottom Layer w0.5: VT1.3 51.816,43.284 52.2,42.9 K1.1 54.4,41.2 53.7,40.5 VD5.1
NetK1_11: K1.11 XP7.2 | length 13.7
  Top Layer w2: XP7.2 51.1,68.3 K1.11
NetK1_12: K1.12 XP7.1 | length 19.3
  Bottom Layer w2: K1.12 56.1,71 XP7.1
NetK1_14: K1.14 XP7.3 | length 9.4
  Top Layer w2: XP7.3 46.1,69 K1.14
NetK2_1: K2.1 VD10.1 VT2.3 | length 7.8
  Bottom Layer w0.5: VT2.3 41.116,43.184 41.4,42.9 K2.1 43.7,41.2 43,40.5 VD10.1
NetK2_11: K2.11 XP8.2 | length 15.4
  Top Layer w2: XP8.2 36.1,73.5 43.7,65.9 K2.11
NetK2_12: K2.12 XP8.1 | length 17.5
  Bottom Layer w2: K2.12 41.1,66.7 XP8.1
NetK2_14: K2.14 XP8.3 | length 12.3
  Top Layer w2: XP8.3 31.1,71.5 34.4,68.2 K2.14
NetR2_2: R2.2 VD2.2 | length 3.1
  Top Layer w0.3: R2.2 82.135,66.475 VD2.2
NetR3_2: R3.2 XP2.2 | length 5.9
  Top Layer w0.3: XP2.2 61.585,41.625 R3.2
NetR11_1: R11.1 VD6.3 | length 1.8
  Top Layer w0.3: R11.1@66.984,57.291 VD6.3
NetR13_2: R13.2 R14.2 VT1.1 | length 3.2
  Bottom Layer w0.3: VT1.1 R14.2@50.8,48.275 ; R14.2 R13.2
NetR15_1: R15.1 VD8.3 | length 1.8
  Top Layer w0.3: R15.1@61.984,57.291 VD8.3
NetR17_2: R17.2 R18.2 VT2.1 | length 3.2
  Bottom Layer w0.3: VT2.1 R18.2@40.1,48.275 ; R18.2 R17.2
NetR19_1: R19.1 R20.2 VD14.2 | length 4.7
  Bottom Layer w0.5: R20.2 R19.1 55.1,34.451 VD14.2
NetR20_1: R20.1 VT4.1 | length 2.4
  Bottom Layer w0.5: R20.1 VT4.1
NetR21_1: R21.1 VD12.1 VT3.1 VT4.3 | length 10.6
  Top Layer w0.5: VT3.1 60.18,27.62 60.9,26.9 v1(60.9,26.2)
  Bottom Layer w0.5: VT4.3 VD12.1@62.167,27.616 ; v1(60.9,26.2) 61.7,26.2 62.167,26.667 VD12.1@62.167,27.616 ; R21.1 62.251,27.7 VD12.1 VD12.1@62.167,27.616
RELAY1: DD1.37 R13.1 | length 20.3
  Top Layer w0.2: v2(52.4,51.7) 65.7,51.7 66.1,52.1 67.4,52.1 68.55,50.95 DD1.37
  Bottom Layer w0.3: R13.1@52.4,49.725 v2(52.4,51.7)
RELAY2: DD1.36 R17.1 | length 33.6
  Top Layer w0.2: v2(41.7,51.7) 51.3,51.7 52,52.4 65.8,52.4 66.9,53.5 71.3,53.5 71.55,53.25 DD1.36
  Bottom Layer w0.3: R17.1 41.675,51.675 v2(41.7,51.7)
RESET: C8.2 DD1.3 R4.2 XP1.1 | length 10.5
  Top Layer w0.2: XP1.1 70.7,42.6 72.1,42.6 72.55,43.05 DD1.3
  Bottom Layer w0.4: C8.2 66.251,40.5 XP1.1 R4.2@68.6,42.625
RXD: DD1.46 XP2.3 | length 8.7
  Top Layer w0.2: XP2.3 65.46,45.5 66.9,45.5 67.85,46.45 DD1.46
SCK: DD1.29 DD2.6 | length 15
  Top Layer w0.2: DD1.29 75.05,54.25 80.5,59.7 82.2,59.7 83.14,60.64 DD2.6
SENSE1: FU3.1 XP5.1 | length 9.3
  Bottom Layer w0.5: FU3.1 XP5.1
SENSE1_F: C13.2 DD1.34 R12.2 VD6.1 | length 12.2
  Top Layer w0.2: C13.2 70.649,57.251 72.55,55.35 DD1.34
  Top Layer w0.3: VD6.1 68,59.5 68.4,59.1 R12.2 69.676,57.275 C13.2
SENSE2: FU4.1 XP5.2 | length 9.3
  Bottom Layer w0.5: FU4.1 XP5.2
SENSE2_F: C14.2 DD1.35 R16.2 VD8.1 | length 16.9
  Top Layer w0.2: C14.2 65.349,57.251 65.8,56.8 65.8,54.7 66.6,53.9 71.7,53.9 72.05,53.55 DD1.35
  Top Layer w0.3: VD8.1 63,59.3 63.4,58.9 R16.2 64.676,57.275 C14.2
SS: DD1.10 DD2.1 | length 18.7
  Top Layer w0.2: DD1.10 76.05,42.95 76.4,42.6 77.9,42.6 v2(80.1,44.8) ; v2@82.2,47.5 v2(82.3,47.5)
  Top Layer w0.3: DD2.1 80.6,48.9 82,47.5 v2@82.2,47.5
  Bottom Layer w0.3: v2(80.1,44.8) 82.3,47 v2(82.3,47.5)
STB: DD1.22 DD1.23 | length 2.5
  Top Layer w0.2: DD1.22 79.45,49.95 79.6,50.1 79.6,50.3 79.45,50.45 DD1.23
TXD: DD1.47 R3.1 | length 6.2
  Top Layer w0.2: R3.1 65.8,44.5 66.4,45.1 67.066,45.1 67.916,45.95 DD1.47
VCC: C1.1 C2.1 C3.1 C5.2 C19.2 C24.1 C25.2 DA2.4 DD1.8 DD1.17 DD1.44 DD2.3 DD2.7 DD2.8 R4.1 R5.2 R6.2 R11.2 R15.2 R24.2 VD3.2 VD4.2 | length 80.4
  Top Layer w0.2: DD1.44 v3(71.4,47.45) ; v3(75,45.4) 75.05,45.35 DD1.8 ; v3(77.1,47.4) 77.15,47.45 DD1.17
  Top Layer w0.3: v2(62,54.6) R15.2 ; v2(67,54.6) R11.2 ; v2(72,61.3) 72.032,61.332 VD3.2 ; v2(75.6,61.3) 75.632,61.332 VD4.2
  Top Layer w0.4: v2(83.1,57.4) 83.14,57.36 DD2.3
  Top Layer w0.5: DA2.4 31.5,50.07 v1(31.5,48) ; v2(75.6,61.3) v1(80.6,61.3) ; DD2.8 v1(80.6,61.3) ; DD2.7 81.87,61.57 81.6,61.3 v1(80.6,61.3)
  Bottom Layer w0.3: v2(62,54.6) v2(67,54.6) 67,56.3 v2(72,61.3) v2(75.6,61.3) ; C2.1 v3(71.4,47.45) v3(71.4,47.45) ; 75,44.5 v3(75,45.4) ; v3(77.1,47.4) 77.9,47.4 78,47.5
  Bottom Layer w0.4: C25.2 33.108,50.075 R24.2 ; C24.1 C24.1@68.551,47.349 ; R4.1 69.575,44.475 69.8,44.7 ; v3(71.4,47.45) v3@71.448,47.45 ; 77.4,43.5 78.7,42.2 R6.2 ; 80.9,57.4 v2(83.1,57.4) 83,57.3 R5.2
  Bottom Layer w0.5: v1(31.5,46.9) v1(31.5,48) C19.2 33.083,50.049 C25.2 ; v1(65.7,47.4) C24.1 70.151,47.4 C2.1 ; 78.3,47.4 79.9,47.4 80.7,48.2 80.7,59.1 80.649,59.151 C5.2 80.6,60.049 v1(80.6,61.3)
  other v1: 66.9,47.4
VIN: FU5.1 XP6.3 | length 6.6
  Top Layer w1: FU5.1 XP6.3
VIN_F: C18.2 C20.1 DA1.6 R22.1 R23.1 VT3.3 | length 11.8
  Bottom Layer w0.4: DA1.6 40.56,33.34 42.4,31.5 C20.1 C20.1@42.649,31.5
  Bottom Layer w0.5: R23.1 R22.1 C18.2 42.6,30.3 42.449,30.451 C20.1
XTALIN: C7.2 DD1.6 QR1.1 | length 9
  Top Layer w0.2: QR1.1 73.5,40 74.05,40.55 DD1.6
  Top Layer w0.3: v2(72.3,37.8) QR1.1
  Bottom Layer w0.3: v2(72.3,37.8) C7.2
XTALOUT: C6.2 DD1.7 QR1.2 | length 9
  Top Layer w0.2: DD1.7 74.55,40.55 75.1,40 QR1.2
  Top Layer w0.3: v2(76.3,37.8) QR1.2
  Bottom Layer w0.3: v2(76.3,37.8) C6.2
pads on no net: DD1.1 DD1.2 DD1.9 DD1.11 DD1.12 DD1.13 DD1.15 DD1.16 DD1.24 DD1.25 DD1.26 DD1.31 DD1.38 DD1.39 DD1.40 DD1.42 DD1.43 DD1.45 DD1.48 Designator2.1 Designator3.1 Designator4.1 Designator5.1 XP2.1 XP2.4 XP2.6 XP6.5

## Polygon pours and split planes (outlines as drawn)
GND on Top Layer "Top Layer-No Net" (hatched Horizontal grid 0.15 track 0.2, remove dead copper, pour order 16): 26,25.5 85.8,25.5 85.8,67.7 78.8,67.7 78.8,80 59.2,80 59.2,70.2 57.5,68.5 57.5,61.6 54.9,59 26,59
VIN_F on Top Layer "Top Layer-No Net" (hatched Horizontal grid 0.15 track 0.2, remove dead copper, pour order 14): 56,25.5 39.5,25.5 39.5,30.1 40.3,30.9 40.6,31.2 42.4,31.2 42.9,31.2 45.5,33.8 45.5,36 53.3,36 54,35.3 54,33.7 54.4,33.3 54.6,33.1 56,33.1
+5V on Top Layer "Top Layer-No Net" (hatched Horizontal grid 0.15 track 0.2, remove dead copper, pour order 17): 29.3,30 28.5,30 26,32.5 26,48 26.6,48.6 29.3,48.6 29.3,44.3 30.1,43.5 30.1,36.8 29.3,36 29.3,35.8
VCC on Top Layer "Top Layer-No Net" (hatched Horizontal grid 0.15 track 0.2, remove dead copper, pour order 18): 31.1,48.5 31.1,45.8 31.3,45.6 36.1,45.6 37.5,47 67.3,47 67.3,49.2 36.1,49.2 34.3,47.4 34.2,47.3 33,47.3 31.8,48.5
GND on Bottom Layer "Top Layer-No Net" (hatched Horizontal grid 0.15 track 0.2, remove dead copper, pour order 15): 26,25.5 85.8,25.5 85.8,67.7 78.8,67.7 78.8,80 59.2,80 59.2,70.2 57.5,68.5 57.5,61.6 54.9,59 26,59
VCC on Bottom Layer "Top Layer-No Net" (hatched Horizontal grid 0.15 track 0.2, remove dead copper, pour order 19): 69.5,47.8 69.5,45 71.1,43.4 77.3,43.4 79.1,45.2 79.1,47.8 77.8,47.8 77.8,45.4 77,44.6 71.5,44.6 70.7,45.4 70.7,47.8

## Keep-outs
Keep-Out Layer:
  the board outline again, w0.2

## Other copper
Top Layer:
  pour cut-out: 30.4,27.6 32.6,27.6 32.6,34.9 30.4,34.9

## Silkscreen, mask and mechanical layers (free items; w line width, h text height)
Top Overlay:
  lines w0.2: 26.6,44.5 27.4,44.5 ; 27,44.1 27,44.9 ; 39.3,26.3 40.1,26.3 ; 39.7,25.9 39.7,26.7
  text "ISP" at 82.7,43.9 h1 r90
Mechanical 1:
  lines w0.2: 25.4,68.475 25.4,72.3 86.375,72.3 86.375,68.475 ; 25.4,69.8 86.4,69.8
TOP mark:
  region: 55.95,88 56.8,87.15 57.65,88
  lines w0.2: 56.8,86.8 56.8,88 ; 56.8,87 56.8,87.1 56.8,87.2 ; 56.8,89.6 56.8,92.6 59.6,92.6 ; 59.6,90.6 59.6,91.1 ; 59.6,94.6 59.6,94.1 ; 63.1,91.1 59.6,91.1 ; 63.1,94.1 59.6,94.1 ; 39.6,89.6 39.6,88 59.6,88 59.6,89.6 39.6,89.6 ; 39.6,89.6 39.6,89.6 ; 59.6,91.1 59.6,92.6 ; 59.6,92.6 59.6,94.1
  lines w0.254: 63.1,91.1 ccw(c63.103,92.6) 63.1,94.1
  text "Установка VD2" at 41.3,96.4 h3
  text "S6_Relay_block_TOP" at 38.6,18.8 h2
BOT mark:
  text "S6_Relay_block_BOT" at 73.4,18.8 h2

## Dimensions
59.6,88 to 59.6,94.1 on TOP mark
59.6,89.6 to 59.6,92.6 on TOP mark